# Altium PCB NIC.PCBDOC (part 2 of 2)
Units mil, origin at the board's own origin, x right, y up, seen from the top; angles counter-clockwise.
Board outline 6450 x 3500 mil, 6 copper layers (Top Layer, Internal Plane 1, MidLayer1, MidLayer2, Internal Plane 2, Bottom Layer); 176 components, 198 nets, 890 pads, 410 vias.
Unrouted connection lines stored in the file: 18.
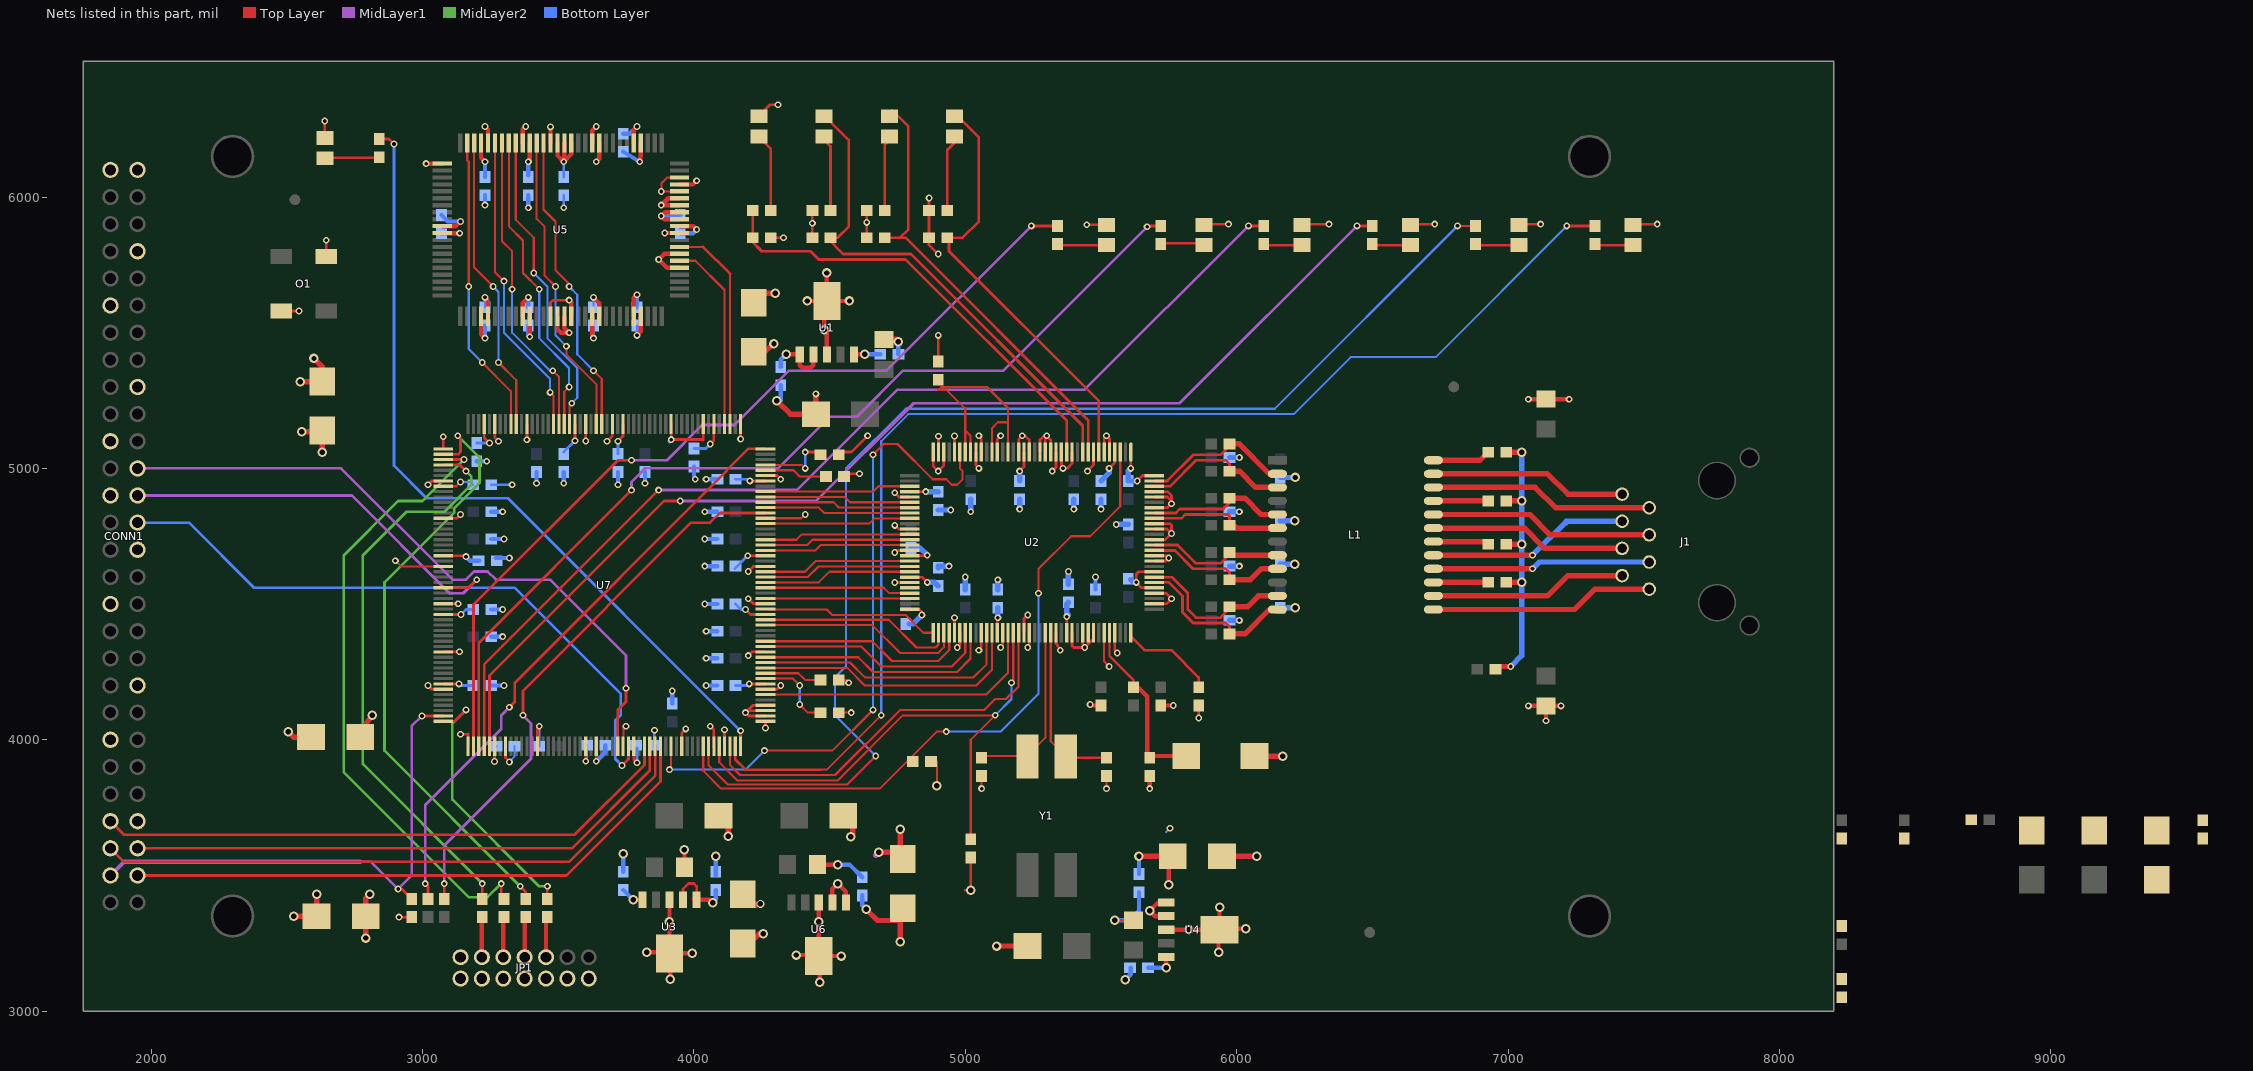
[diagram p6: the nets of this part, all layers, seen from the top]

## Via types
v1: diameter 25, hole 13.5, Top Layer to Bottom Layer, 333 vias
v2: diameter 35, hole 20, Top Layer to Bottom Layer, 76 vias
v3: diameter 30, hole 20, Top Layer to Bottom Layer, 1 vias

## Nets (pads, with @x,y where several pads share a name; then routed paths per layer and width w, separated by ;. In a path a pad name is that pad's centre, name@x,y a point inside that pad or via, vN(x,y) a via of type N, cw(c..) or ccw(c..) an arc to the next point about the centre after c; other vN are vias at no path point) (continued)
DQ24: U5.18 U7.131 | length 1124.3
  Top Layer w8: U5.18@3446.02,6199.1 3446.02,5953.98 3490,5910 3490,5730 3540,5680 v1(3540,5670) ; v1(3630,5360) 3660.16,5329.84 U7.131@3660.16,5163.5
  Bottom Layer w8: v1(3540,5670) 3570,5640 3570,5420 v1(3630,5360)
DQ25: U5.19 U7.132 | length 1126.7
  Top Layer w8: U5.19@3420.43,6199.1 3420.43,5919.57 3450,5890 3450,5710 v1(3490,5670) ; v1(3530,5450) 3530,5420 3640.47,5309.53 U7.132@3640.47,5163.5
  Bottom Layer w8: v1(3490,5670) 3490,5490 v1(3530,5450)
DQ26: U5.22 U7.137 | length 1140.9
  Top Layer w8: U5.22@3343.66,6199.1 3343.66,5916.34 3410,5850 v1(3410,5720) ; U7.137@3542.05,5163.5 3542.05,5232.05 v1(3550,5240)
  Bottom Layer w8: v1(3410,5720) 3460,5670 3460,5480 3570,5370 3570,5260 v1(3550,5240)
DQ27: U5.23 U7.138 | length 1134.8
  Top Layer w8: U5.23@3318.07,6199.1 3318.07,5891.93 3370,5840 3370,5720 v1(3430,5660) ; U7.138@3522.36,5163.5 3522.36,5282.36 v1(3540,5300)
  Bottom Layer w8: v1(3430,5660) 3430,5480 3540,5370 v1(3540,5300)
DQ28: U5.24 U7.139 | length 1128.5
  Top Layer w8: U5.24@3292.48,6199.1 3292.48,5837.52 3330,5800 v1(3330,5660) ; v1(3480,5360) 3502.68,5337.32 U7.139@3502.68,5163.5
  Bottom Layer w8: v1(3330,5660) 3330,5500 3470,5360 v1(3480,5360)
DQ29: U5.25 U7.140 | length 1125.1
  Top Layer w8: U5.25@3266.89,6199.1 3266.89,5723.11 v1(3300,5690) ; v1(3470,5280) 3482.99,5267.01 U7.140@3482.99,5163.5
  Bottom Layer w8: v1(3300,5690) 3300,5500 3470,5330 v1(3470,5280)
DQ30: U5.28 U7.147 | length 1080.8
  Top Layer w8: U5.28@3190,6180 3190,5740 v1(3260,5670) ; v1(3280,5390) 3345.2,5324.8 U7.147@3345.2,5163.5
  Bottom Layer w8: v1(3260,5670) 3280,5650 v1(3280,5390)
DQ31: U5.29 U7.148 | length 1102.3
  Top Layer w8: U5.29@3164.53,6199.1 3164.53,6135.47 3170,6130 v1(3170,5670) ; v1(3220,5390) 3325.51,5284.49 U7.148@3325.51,5163.5
  Bottom Layer w8: v1(3170,5670) 3170,5440 v1(3220,5390)
GND: C1.1 C2.1 C3.1 C4.1 C5.1 C6.1 C7.1 C8.1 C9.1 C10.1 C11.1 C12.1 C13.1 C14.1 C15.1 C16.1 C17.1 C18.1 C19.2 C20.2 C21.2 C22.2 C23.1 C24.1 C25.1 C26.1 C28.1 C29.1 C30.1 C31.2 C32.1 C33.2 C34.2 C35.2 C36.2 C37.2 C38.2 C39.2 C40.2 C41.2 C42.2 C43.2 C44.2 C45.2 C46.2 C47.2 C48.2 C49.2 C50.2 C51.1 C52.1 C53.1 C54.1 C55.1 C56.1 C57.1 C58.1 C59.1 C60.2 C61.1 C62.1 C63.1 C64.1 C65.1 C66.1 C67.1 C68.1 C69.1 C70.1 C71.1 C72.1 C73.1 C74.1 C75.2 C76.2 C77.1 C78.2 C79.2 C80.1 C81.2 C82.2 C83.2 C84.2 C85.2 C86.2 C87.2 C88.2 C89.1 C90.1 C91.1 C92.1 C93.1 C94.1 C95.1 C96.1 C97.1 C98.2 C99.1 CONN1.2 CONN1.7 CONN1.12 CONN1.17 CONN1.22 CONN1.26 CONN1.29 CONN1.34 CONN1.39 CONN1.44 CONN1.49 DS1.2 DS2.2 DS3.2 DS4.2 DS5.2 DS6.2 DS7.2 DS11.2 JP1.1 JP1.3 JP1.5 JP1.7 JP1.9 JP1.11 JP1.13 O1.2 R10.1 R18.2 R25.1 R31.1 R35.1 U1.3 U2.1 U2.5 U2.6 U2.8 U2.12 U2.14 U2.16 U2.17 U2.18 U2.20 U2.22 U2.26 U2.30 U2.36 U2.38 U2.43 U2.49 U2.54 U2.59 U2.64 U2.70 U2.74 U2.78 U2.82 U2.88 U2.91 U2.93 U2.94 U2.95 U2.97 U2.99 U2.104 U2.106 U2.107 U2.110 U2.112 U2.113 U2.116 U2.118 U2.119 U2.122 U2.124 U2.125 U2.128 U3.3 U4.3 U5.5 U5.10 U5.17 U5.21 U5.26 U5.31 U5.40 U5.55 U5.60 U5.64 U5.67 U5.71 U5.76 U5.85 U5.87 U5.90 U5.92 U5.93 U5.94 U5.95 U5.96 U5.98 U6.3 U7.1 U7.8 U7.14 U7.25 U7.30 U7.41 U7.47 U7.53 U7.59 U7.66 U7.75 U7.82 U7.91 U7.99 U7.105 U7.112 U7.118 U7.129 U7.134 U7.145 U7.151 U7.157 U7.163 U7.170 U7.179 U7.186 U7.195 U7.202 | length 15221.7
  Top Layer w8: v1(2900,4660) 2921.1,4638.9 U7.179@3076.5,4638.9 ; U7.30@3738.9,3976.5 v1@3740,4050 ; U5.96@3947.21,6020.75 3880.75,6020.75 v1(3880,6020) 3880,6050 3901.93,6071.93 U5.98@3947.21,6071.93 ; U7.91@4263.5,4816.06 4396.06,4816.06 v1(4410,4830) ; R35.1@4533.46,4220 4560,4220 v1(4570,4210) ; R18.2@4900,5415.12 v1(4900,5490) ; v1(5050,4330) 5058.82,4338.82 U2.74@5058.82,4394.65 ; v1(5060,3820) C33.2@5060,3866.54 ; U2.97@5511.57,4394.65 5511.57,4288.43 v1(5530,4270) ; v1(5520,3820) C34.2@5520,3866.54 ; U2.99@5550.94,4394.65 5550.94,4329.06 v1(5560,4320) ; v2(5551.12,3335.12) C89.1@5620,3335.12
  Top Layer w10: O1.2@2480,5580 v1(2545,5580) ; DS7.2@2640,6217.4 v1(2640,6280) ; v1(3020,4200) 3033.86,4186.14 U7.202@3076.5,4186.14 ; v1(3020,4940) 3033.86,4953.86 U7.163@3076.5,4953.86 ; U7.195@3076.5,4323.94 v1(3136.06,4323.94) ; U7.186@3076.5,4501.1 v1(3131.1,4501.1) ; U7.170@3076.5,4816.06 3126.06,4816.06 v1(3140,4830) ; U7.157@3076.5,5071.97 v1(3076.5,5116.5) ; v1(3140,4020) 3166.06,4020 3168.03,4021.97 U7.1@3168.03,3976.5 ; U7.151@3266.46,5163.5 3266.46,5113.54 v1(3280,5100) ; U7.8@3305.83,3976.5 3305.83,3934.17 v1@3320,3920 ; v1(3384.57,5105.43) U7.145@3384.57,5163.5 ; U7.14@3423.94,3976.5 3423.94,4043.94 v1(3430,4050) ; U5.64@3471.61,5560.9 3471.61,5611.61 3480,5620 v1(3540,5620) ; v1(3601.1,5101.1) U7.134@3601.1,5163.5 ; v1(3640.47,3920.47) U7.25@3640.47,3976.5 ; v1(3680,5100) 3699.53,5119.53 U7.129@3699.53,5163.5 ; U7.118@3916.06,5163.5 v1(3916.06,5106.06) 4032.28,5106.06 4034.17,5104.17 U7.112@4034.17,5163.5 ; U7.41@3955.43,3976.5 3955.43,4025.43 v1(3970,4040) ; v1(4060,4050) 4073.54,4036.46 4073.54,3973.54 U7.47@4071.76,3971.76 ; v1(4171.97,5108.03) U7.105@4171.97,5163.5 ; v1(4200,4310) 4213.94,4323.94 U7.66@4263.5,4323.94 ; v1(4200,4520) 4218.9,4501.1 U7.75@4263.5,4501.1 ; v1(4200,4620) 4218.9,4638.9 U7.82@4263.5,4638.9 ; DS11.2@4240,6300 4280,6340 v1(4310,6340) ; v1(4263.5,4043.5) U7.53@4263.5,4068.03 ; U7.59@4263.5,4186.14 4306.14,4186.14 v1(4320,4200) ; U7.99@4263.5,4973.54 4306.46,4973.54 v1(4320,4960) ; R31.1@4283.46,5850 v1(4330,5850) ; R25.1@4533.46,5060 4580,5060 v1(4640,5120) ; v1(4740,4790) 4753.46,4776.54 U2.49@4795.04,4776.54 ; v1(4740,4910) 4755.35,4894.65 U2.43@4795.04,4894.65 ; v1(4740.31,4579.69) U2.59@4795.04,4579.69 ; U2.64@4795.04,4481.26 4828.74,4481.26 4840,4470 v1(4840,4460) ; U2.54@4795.04,4678.11 4858.11,4678.11 v1(4860,4680) ; U2.38@4881.65,5060 4881.65,5008.35 v1(4900,4990) 4921.02,5011.02 U2.36@4921.02,5060 ; v1(4970,4340) 4980.08,4350.08 U2.70@4980.08,4394.65 ; U2.30@5039.14,5060 5039.14,5010.86 v1(5050,5000) ; U2.26@5117.88,5060 5117.88,5107.88 v1(5130,5120) ; v1(5130,4340) 5137.56,4347.56 U2.78@5137.56,4394.65 ; U2.22@5196.61,5060 5196.61,5106.61 v1(5210,5120) 5220,5120 5235.98,5104.02 U2.20@5235.98,5060 ; U2.82@5216.3,4394.65 5216.3,4446.3 v1(5230,4460) ; U2.18@5275.35,5060 5275.35,5105.35 5290,5120 v1(5300,5120) ; U2.17@5295.04,5060 5295.04,5115.04 v1(5300,5120) ; U2.16@5314.73,5060 5314.73,5105.27 v1(5300,5120) ; U2.88@5334.41,4394.65 5334.41,4355.59 v1(5350,4330) ; U2.14@5354.1,5060 5354.1,5005.9 v1(5360,5000) 5375.73,5000 5393.47,5017.74 U2.12@5393.47,5060 ; U2.91@5393.47,4394.65 5393.47,4346.53 5400,4340 v1(5440,4340) ; U2.93@5432.84,4394.65 5432.84,4347.16 v1(5440,4340) ; v1(5447.4,5897.4) DS1.2@5520,5897.4 ; v1(5450,4990) 5472.2,5012.2 U2.8@5472.2,5060 ; 5452.52,4352.52 U2.94@5452.52,4394.65 ; U2.95@5472.2,4394.65 5472.2,4372.2 v1(5440,4340) ; U2.6@5511.57,5060 5511.57,5111.57 v1(5520,5120) 5531.26,5108.74 U2.5@5531.26,5060 ; v1@5550,4800 v1(5556.54,4793.46) ; v1(5610,5000) U2.1@5610,5060 ; v1(5633.46,4953.46) 5653.39,4973.39 U2.128@5696.61,4973.39 ; U2.104@5696.61,4500.95 5740.95,4500.95 v1(5760,4520) 5739.68,4540.32 U2.106@5696.61,4540.32 ; U2.107@5696.61,4560 5650,4560 v1(5630,4580) 5630,4610 5639.06,4619.06 U2.110@5696.61,4619.06 ; U2.112@5696.61,4658.43 5738.43,4658.43 v1(5750,4670) 5741.89,4678.11 U2.113@5696.61,4678.11 ; U2.116@5696.61,4737.17 5737.17,4737.17 v1(5760,4760) ; U2.118@5696.61,4776.54 5743.46,4776.54 v1(5760,4760) ; U2.119@5696.61,4796.22 5753.78,4796.22 5760,4790 v1(5760,4760) ; U2.122@5696.61,4855.28 5745.28,4855.28 v1(5760,4870) 5760,4900 5745.67,4914.33 U2.125@5696.61,4914.33 ; U2.124@5696.61,4894.65 5745.35,4894.65 v1@5760,4880 ; v1(5860,4080) R10.1@5860,4126.54 ; DS2.2@5900,5900 v1(5970,5900) ; DS3.2@6260,5900 v1(6340,5900) ; DS4.2@6660,5900 v1(6730,5900) ; DS5.2@7060,5900 v1(7120,5900) ; DS6.2@7490,5900 v1(7550,5900)
  Top Layer w16: v1(3013.11,6123.11) U5.31@3072.79,6123.11 ; U5.40@3072.79,5892.8 3122.8,5892.8 v1(3140,5910) ; v1(3230,5630) 3241.3,5618.7 U5.55@3241.3,5560.9 ; v1(3230,6260) 3241.3,6248.7 U5.26@3241.3,6199.1 ; U5.60@3369.25,5560.9 3369.25,5609.25 v1(3390,5630) ; U5.21@3369.25,6199.1 3369.25,6249.25 v1(3380,6260) ; U5.17@3471.61,6199.1 v1(3471.61,6258.39) ; v1(3540,5620) 3548.39,5611.61 U5.67@3548.39,5560.9 ; v1(3630,5630) 3650.75,5609.25 U5.71@3650.75,5560.9 ; v1(3640,6130) 3650.75,6140.75 U5.10@3650.75,6199.1 ; U5.76@3778.7,5560.9 3778.7,5628.7 v1(3790,5640) ; U5.5@3778.7,6199.1 3778.7,6248.7 v1(3790,6260) ; v2(3826.85,3216.85) U3.3@3910,3216.85 ; v1(3892.8,5867.2) U5.90@3947.21,5867.2 ; U3.3@3910,3213.15 v2(3993.15,3213.15) ; U3.3@3910,3410 3910,3210 U3.3@3920,3200 ; v2(3913.15,3116.85) U3.3@3913.15,3200 ; U5.85@3947.21,5739.25 3900.75,5739.25 v1(3870,5770) 3890.43,5790.43 U5.87@3947.21,5790.43 ; U5.92@3947.21,5918.39 3891.61,5918.39 v1(3880,5930) 3893.98,5943.98 U5.93@3947.21,5943.98 ; U5.94@3947.21,5969.57 3880.43,5969.57 v1(3880,5970) 3905.16,5995.16 U5.95@3947.21,5995.16 ; C77.1@3965.12,3530 v2(3965.12,3595.12) ; v2(4376.85,3206.85) U6.3@4460,3206.85 ; v2(4416.85,5616.85) v2(4573.15,5616.85) ; C99.1@4455.12,3540 v2(4530,3540) ; U6.3@4460,3200 U6.3@4470,3190 ; U6.3@4460,3203.15 v2(4543.15,3203.15) ; U6.3@4460,3230 U6.3@4460,3400 ; v2(4463.15,3106.85) U6.3@4463.15,3190 ; v2(4480,5510) U1.3@4480,5590 ; U1.3@4490,5430 v2@4490,5510 ; U1.3@4490,5610 v2(4490,5720) ; v1@5463.46,4126.54 C15.1@5500,4126.54 ; v1(5680,3820) C17.1@5680,3866.54 ; C16.1@5720,4126.54 v1(5766.54,4126.54) ; U4.3@5740,3300 v2(5824,3300) ; v2@5830,3300 U4.3@5936.85,3300 v2(5936.85,3383.15) ; v2(5933.15,3216.85) U4.3@5933.15,3300 ; U4.3@5940,3300 U4.3@5950,3310 ; U4.3@5950,3303.15 v2(6033.15,3303.15) ; v1(7074.88,4124.88) v1(7194.88,4124.88) ; v1(7074.88,5255.12) v1(7224.88,5255.12) ; v1(7140,4070) C29.1@7140,4124.88
  Top Layer w20: v2(2550,5320) C81.2@2630,5320 ; v2(2600,5405) 2630,5375 C81.2@2630,5320.55 ; C82.2@2770.55,4010 2770.55,4030.55 v2(2815,4090) ; v2(2790.55,3269.45) 2790.55,3415.55 v2(2805,3430) ; v2(4125.98,3644.02) C75.2@4125.98,3720 ; C78.2@4190,3215 4190,3235 v2@4240,3285 ; C76.2@4220,5645.98 4299.02,5645.98 v2(4300,5645) ; v2(4305,5250) 4355,5200 C31.2@4449.45,5200 v1(4449.45,5274.45) ; v2(4577.34,3642.34) 4585.98,3650.98 C98.2@4585.98,3720 ; v2(4680.98,3585.98) 4760,3585.98 v2(4760,3670) ; C71.1@4700,5475.12 4744.88,5475.12 v2(4753.46,5466.54) ; v2(5115,3240) C87.2@5194.02,3240 ; C86.2@5981.1,3570.88 v2(6074.12,3570.88) ; C18.1@6065.98,3940 v2(6170,3940)
  MidLayer1 w20: v2@4670,3575 v2(4680.98,3585.98)
  Bottom Layer w8: C57.1@3230,5593.46 v1(3230,5630) ; C8.1@3253.46,4940 v1(3330,4940) ; v1@3320,3920 3339.29,3939.29 C91.1@3339.29,3976.5 ; C59.1@3630,5593.46 v1(3630,5630) ; v1@5040,4330 v1(5050,4330) ; 5740,3660 v1(5754.02,3674.02) ; v1@7070,4120 v1(7074.88,4124.88) ; v1(7194.88,4124.88) v1@7200,4130
  Bottom Layer w10: C94.1@3429.84,3976.5 3429.84,4049.84 v1(3430,4050) ; v1(3520,5960) C53.1@3520,6006.54 ; C13.1@3853.46,3980 3853.46,4033.46 v1(3855,4035)
  Bottom Layer w16: C55.1@3070,5933.46 3093.46,5910 v1(3140,5910) ; C90.1@3200,5026.54 v1(3236.54,5026.54) ; v1(3230,5970) C51.1@3230,6006.54 ; C11.1@3253.46,4200 v1@3290,4200 ; C65.1@3253.46,4380 v1@3290,4380 ; C10.1@3253.46,4480 v1@3290,4480 ; C64.1@3253.46,4740 v1@3290,4740 ; C1.1@3253.46,4840 v1@3290,4840 ; C9.1@3270,4670 3306.54,4670 ; C58.1@3390,5593.46 v1(3390,5630) ; v1(3390,5960) C52.1@3390,6006.54 ; v1@3420,4950 C3.1@3420,4986.54 ; v1@3520,4950 C68.1@3520,4986.54 ; v1(3640.47,3920.47) 3673.46,3953.46 C12.1@3673.46,3980 ; v1@3720,4950 C69.1@3720,4986.54 ; C80.1@3740,3513.46 v2(3740,3580) ; C54.1@3740,6233.46 3763.46,6233.46 v1(3790,6260) ; C60.2@3790,5593.46 v1(3790,5640) ; v1@3820,4950 C4.1@3820,4986.54 ; v1(3880,5930) 3946.54,5930 C56.1@3950,5933.46 ; v1@3910,5100 v1(3916.06,5106.06) ; C63.1@3920,4133.46 v1@3920,4170 ; v1@4000,4970 C93.1@4000,5006.54 ; v1@4050,4200 C14.1@4086.54,4200 ; v1@4050,4300 C62.1@4086.54,4300 ; v1@4050,4400 C6.1@4086.54,4400 ; v1@4050,4500 C66.1@4086.54,4500 ; v1@4050,4640 C92.1@4086.54,4640 ; v1@4050,4740 C7.1@4086.54,4740 ; v1@4050,4840 C5.1@4086.54,4840 ; v1@4050,4960 C67.1@4086.54,4960 ; C32.1@4080,3500 v2(4080,3570) ; v2@4320,5250 C30.1@4320,5306.54 ; v2(4530,3540) 4573.46,3540 C74.1@4620,3493.46 ; C73.1@4753.46,5420 v2(4753.46,5466.54) ; C46.2@5480,4553.46 v1(5480,4600) ; v2(5551.12,3335.12) 5605.12,3335.12 5640,3370 C72.1@5640,3438.28 ; v2(5590,3116) 5610,3136 C97.1@5610,3160
  Bottom Layer w20: v1@4740,4580 v1(4740.31,4579.69) ; C43.2@4793.46,4426.54 4806.54,4426.54 v1(4840,4460) ; C42.2@4800,4706.54 4833.46,4706.54 v1(4860,4680) ; C39.2@4900,4633.46 4900,4640 v1(4940,4640) ; C35.2@4900,4846.54 v1(4946.54,4846.54) ; C44.2@5000,4553.46 v1(5000,4600) ; v1(5020,4840) C41.2@5020,4886.54 ; C36.2@5120,4553.46 v1(5120,4590) ; v1(5200,4850) C45.2@5200,4886.54 ; C37.2@5380,4573.46 v1(5380,4620) ; v1(5400,4850) C40.2@5400,4886.54 ; v1(5500,4850) C38.2@5500,4886.54 ; v1(5556.54,4793.46) C48.2@5600,4793.46 ; C47.2@5610,4590 5620,4580 v1(5630,4580) ; v1(5610,5000) 5600,4990 C49.2@5600,4953.46 v1(5633.46,4953.46) ; C20.2@5973.46,4440 v1(6010,4440) ; C21.2@5973.46,4640 v1(6010,4640) ; C22.2@5973.46,4840 v1(6010,4840) ; C19.2@5973.46,5040 v1(6010,5040) ; C26.1@6160,4486.54 v2(6216.54,4486.54) ; C25.1@6160,4646.54 v2(6213.46,4646.54) ; C24.1@6160,4806.54 v2(6213.46,4806.54) ; C23.1@6160,4966.54 v2(6216.54,4966.54)
  other v1: 3320,3918 3750,4050 5460,4130 3920,4180 3300,4200 4045,4200 4045,4300 3295,4380 4045,4400 3295,4480 4040,4500 4040,4640 3320,4670 3300,4740 4040,4740 3295,4840 4040,4840 3720,4940 3420,4945 3520,4945 3820,4945 4005,4960 4045,4960
  other v2: 4255,3285 3910,3330 4460,3330
GTX_CLK: U2.79 U7.58 | length 1074.6
  Top Layer w8: U7.58@4263.5,4166.46 5076.46,4166.46 5157.24,4247.24 U2.79@5157.24,4394.65
IOCLK: CONN1.25 U7.183 | length 1555.7
  Top Layer w10: U7.183@3076.5,4560.16 3170.16,4560.16 v1(3200,4590)
  MidLayer1 w10: CONN1.25@1950,4900 2740,4900 3100,4540 3150,4540 v1(3200,4590)
LED0: R2.2 U7.2 | length 3251.6
  Top Layer w10: U7.2@3187.72,3976.5 3187.72,4497.72 3720,5030 v1(3770,5030) ; v1(5243.46,5893.46) R2.2@5340,5893.46
  MidLayer1 w10: v1(3770,5030) 3900,5030 4030,5160 4150,5160 4350,5360 4710,5360 v1(5243.46,5893.46)
LED1: R3.2 U7.3 | length 3542.4
  Top Layer w10: U7.3@3207.4,3976.5 3207.4,4357.4 v1(3770,4920) ; v1@5673.46,5893.46 R3.2@5720,5893.46
  MidLayer1 w10: v1(3770,4920) 3770,4950 3820,5000 4310,5000 4500,5190 4600,5190 4770,5360 5140,5360 v1(5670,5890)
LED2: R4.2 U7.4 | length 3843
  Top Layer w10: U7.4@3227.09,3976.5 3227.09,4277.09 v1(3870,4920) ; v1(6043.46,5893.46) R4.2@6100,5893.46
  MidLayer1 w10: v1(3870,4920) 4380,4920 4750,5290 5440,5290 v1(6043.46,5893.46)
LED3: R5.2 U7.5 | length 4199.7
  Top Layer w10: U7.5@3246.77,3976.5 3246.77,4236.77 3890,4880 v1(3950,4880) ; v1(6443.46,5893.46) R5.2@6500,5893.46
  MidLayer1 w10: v1(3950,4880) 4450,4880 4810,5240 5790,5240 v1(6443.46,5893.46)
LED4: R6.2 U7.46 | length 4588.2
  Top Layer w8: U7.46@4053.86,3976.5 4053.86,3906.14 4125,3835 4565,3835 v1(4670,3940) ; v1(6813.46,5893.46) R6.2@6880,5893.46
  Bottom Layer w8: v1(4670,3940) 4520,4090 4520,4230 4560,4270 4560,5000 4780,5220 6140,5220 v1(6813.46,5893.46)
LED5: R7.2 U7.51 | length 4663.6
  Top Layer w8: 4467.37,3890 4490,3890 v1(4690,4090)
  Top Layer w10: U7.51@4152.28,3976.5 4152.28,3927.72 4190,3890 4467.37,3890 ; v1(7216.54,5893.46) R7.2@7320,5893.46
  Bottom Layer w8: v1@4690,4080 4690,5100 4790,5200 6210,5200 6420,5410 6733.07,5410 v1(7216.54,5893.46)
LED6: R1.2 U7.52 | length 2985.8
  Top Layer w10: R1.2@2840,6213.46 2876.54,6213.46 v1(2895,6195) ; U7.52@4171.97,3976.5 v1(4171.97,4033.03)
  Bottom Layer w10: v1(2895,6195) 2895,5010 3015,4890 3315,4890 v1(4171.97,4033.03)
NetC17_2: C17.2 C18.2 R8.1 U2.98 | length 676.1
  Top Layer w8: U2.98@5531.26,4394.65 5531.26,4308.74 5620,4220 R8.1@5620,4193.46
  Top Layer w16: R8.1@5620,4193.46 5636.54,4193.46 5670,4160 5670,3956.54 5686.54,3940 C18.2@5834.02,3940
NetC27_2: C27.2 R19.1 R20.1 R21.1 R22.1 | length 1093.4
  Top Layer w20: C27.2@6953.46,4260 6963.46,4270 v1(7010,4270) ; R19.1@6993.46,4580 v2(7050,4580) ; R20.1@6993.46,4720 v2(7050,4720) ; R21.1@6993.46,4880 v2(7050,4880) ; R22.1@6993.46,5060 v2(7050,5060)
  Bottom Layer w20: v1(7010,4270) 7050,4310 v2(7050,5060)
NetC33_1: C33.1 U2.86 Y1.1 | length 650.2
  Top Layer w8: C33.1@5060,3940 5227.64,3940 5295.04,4007.4 U2.86@5295.04,4394.65
NetC34_1: C34.1 U2.87 Y1.2 | length 630.6
  Top Layer w8: U2.87@5314.73,4394.65 5314.73,3994.64 5375.91,3933.46 C34.1@5520,3933.46
NetC73_2: C73.2 U1.5 | length 96.5
  Top Layer w16: U1.5@4590,5420 v2(4630,5420)
  Bottom Layer w16: v2(4630,5420) C73.2@4686.54,5420
NetC80_2: C80.2 U3.5 | length 85.1
  Top Layer w16: v2(3776.54,3410) U3.5@3810,3410
  Bottom Layer w16: C80.2@3740,3446.54 v2(3776.54,3410)
NetC97_2: C97.2 U4.5 | length 106.5
  Top Layer w16: v2(5740,3160) U4.5@5740,3200
  Bottom Layer w16: C97.2@5673.46,3160 v2(5740,3160)
NetDS1_1: DS1.1 R2.1 | length 176.1
  Top Layer w10: R2.1@5343.94,5822.6 DS1.1@5520,5822.6
NetDS2_1: DS2.1 R3.1 | length 151.5
  Top Layer w10: R3.1@5723.46,5830 DS2.1@5875,5830
NetDS3_1: DS3.1 R4.1 | length 136.1
  Top Layer w10: R4.1@6103.94,5822.6 DS3.1@6240,5822.6
NetDS4_1: DS4.1 R5.1 | length 141.6
  Top Layer w10: R5.1@6500,5826.54 6503.94,5822.6 DS4.1@6640,5822.6
NetDS5_1: DS5.1 R6.1 | length 156.1
  Top Layer w10: R6.1@6883.94,5822.6 DS5.1@7040,5822.6
NetDS6_1: DS6.1 R7.1 | length 136.1
  Top Layer w10: R7.1@7323.94,5822.6 DS6.1@7460,5822.6
NetDS7_1: DS7.1 R1.1 | length 195
  Top Layer w10: DS7.1@2650,6145 R1.1@2845,6145
NetDS8_1: DS8.1 R32.1 | length 261
  Top Layer w10: R32.1@4933.46,5950 4933.46,6173.46 DS8.1@4960,6200
NetDS8_2: DS8.2 R28.1 U2.7 | length 1593.1
  Top Layer w10: R28.1@4933.46,5850 4990,5850 5050,5910 5050,6220 DS8.2@4970,6300 ; R28.1@4940,5860 4940,5800 5491.89,5248.11 U2.7@5491.89,5060
NetDS9_1: DS9.1 R33.1 | length 281
  Top Layer w10: R33.1@4703.46,5950 4703.46,6193.46 DS9.1@4730,6220
NetDS9_2: DS9.2 R29.1 U2.9 | length 1645.8
  Top Layer w10: R29.1@4710,5850 4780,5850 5452.52,5177.48 U2.9@5452.52,5060 ; DS9.2@4730,6320 4790,6260 4790,5880 4760,5850
NetDS10_1: DS10.1 R34.1 | length 269.7
  Top Layer w10: DS10.1@4480,6210 4503.46,6186.54 R34.1@4503.46,5950
NetDS10_2: DS10.2 R30.1 U2.10 | length 1841.4
  Top Layer w10: R30.1@4490,5850 4550,5790 4800,5790 5432.84,5157.16 U2.10@5432.84,5060 ; DS10.2@4498.37,6291.63 4498.37,6281.63 4570,6210 4570,5890 4530,5850 R30.1@4503.46,5850
NetDS11_1: DS11.1 R27.1 | length 288
  Top Layer w10: DS11.1@4240,6220 4283.46,6176.54 R27.1@4283.46,5950
NetJ1_1: J1.1 L1.13 | length 831.1
  Top Layer w20: L1.13@6725,4480 7245,4480 7320,4555 ; 7325,4555 J1.1@7530,4555
NetJ1_2: J1.2 L1.14 | length 736.1
  Top Layer w20: L1.14@6725,4530 7145,4530 7220,4605 J1.2@7430,4605
NetJ1_3: J1.3 L1.16 | length 805.4
  Top Layer w20: L1.16@6725,4630 v1(7090,4630)
  Bottom Layer w20: v1(7090,4630) 7115,4655 J1.3@7520,4655
NetJ1_4: J1.4 L1.19 | length 736.1
  Top Layer w20: L1.19@6725,4780 7060,4780 7135,4705 J1.4@7430,4705
NetJ1_5: J1.5 L1.20 | length 826.1
  Top Layer w20: L1.20@6725,4830 7080,4830 7155,4755 J1.5@7520,4755
NetJ1_6: J1.6 L1.17 | length 751.8
  Top Layer w20: L1.17@6725,4680 v1(7090,4680)
  Bottom Layer w20: v1(7090,4680) 7215,4805 J1.6@7420,4805 ; 7210,4800 7215,4800
NetJ1_7: J1.7 L1.22 | length 841.1
  Top Layer w20: L1.22@6710,4930 7100,4930 7175,4855 J1.7@7520,4855
NetJ1_8: J1.8 L1.23 | length 726.1
  Top Layer w20: L1.23@6725,4980 7145,4980 7220,4905 J1.8@7420,4905
NetL1_2: L1.2 R17.1 U2.127 | length 552.7
  Top Layer w10: U2.127@5696.61,4953.7 5743.7,4953.7 5840,5050 5940,5050 5973.46,5083.46 R17.1@5973.46,5090
  Top Layer w20: R17.1@5980,5090 6010,5090 6120,4980 L1.2@6150,4980
NetL1_3: L1.3 R16.1 U2.126 | length 550.1
  Top Layer w10: U2.126@5696.61,4934.02 5754.02,4934.02 5850,5030 5960,5030 5973.46,5016.54 R16.1@5973.46,4990
  Top Layer w20: R16.1@5973.46,4990 6010,4990 6070,4930 L1.3@6150,4930
NetL1_5: L1.5 R15.1 U2.121 | length 510.5
  Top Layer w10: U2.121@5696.61,4835.59 5775.59,4835.59 5790,4850 5950,4850 5973.46,4873.46 R15.1@5973.46,4890
  Top Layer w20: R15.1@5973.46,4890 6030,4890 6090,4830 L1.5@6150,4830
NetL1_6: L1.6 R14.1 U2.120 | length 494.8
  Top Layer w10: U2.120@5696.61,4815.91 5795.91,4815.91 5810,4830 5970,4830 5973.46,4826.54 R14.1@5973.46,4790
  Top Layer w20: R14.1@5980,4790 5990,4790 6000,4780 L1.6@6150,4780
NetL1_8: L1.8 R13.1 U2.115 | length 494.4
  Top Layer w10: U2.115@5696.61,4717.48 5782.52,4717.48 5850,4650 5940,4650 R13.1@5970,4680
  Top Layer w20: R13.1@5973.46,4690 5983.46,4680 L1.8@6150,4680
NetL1_9: L1.9 R12.1 U2.114 | length 530.1
  Top Layer w10: U2.114@5696.61,4697.8 5772.2,4697.8 5840,4630 5960,4630 5973.46,4616.54 R12.1@5973.46,4590
  Top Layer w20: R12.1@5973.46,4590 6050,4590 6090,4630 L1.9@6150,4630
NetL1_11: L1.11 R9.1 U2.109 | length 575.9
  Top Layer w10: U2.109@5696.61,4599.37 5760.63,4599.37 5820,4540 5820,4480 5850,4450 5940,4450 R9.1@5970,4480
  Top Layer w20: R9.1@5973.46,4490 6040,4490 6080,4530 L1.11@6150,4530
NetL1_12: L1.12 R11.1 U2.108 | length 626.7
  Top Layer w10: U2.108@5690,4580 5750,4580 5800,4530 5800,4470 5840,4430 5960,4430 5973.46,4416.54 R11.1@5973.46,4390
  Top Layer w20: R11.1@5973.46,4390 6030,4390 6120,4480 L1.12@6150,4480
NetL1_15: L1.15 R19.2 | length 201.5
  Top Layer w20: L1.15@6725,4580 R19.2@6926.54,4580
NetL1_18: L1.18 R20.2 | length 199.1
  Top Layer w20: L1.18@6725,4730 6910,4730 R20.2@6920,4720
NetL1_21: L1.21 R21.2 | length 201.5
  Top Layer w20: L1.21@6725,4880 R21.2@6926.54,4880
NetL1_24: L1.24 R22.2 | length 214
  Top Layer w20: L1.24@6725,5030 6896.54,5030 R22.2@6926.54,5060
NetR10_2: R10.2 U2.102 | length 348.7
  Top Layer w10: U2.102@5610,4380 5660,4330 5760,4330 5860,4230 R10.2@5860,4193.46
NetR18_1: R18.1 U2.24 U2.27 U2.31 U2.32 | length 975.3
  Top Layer w8: 4900,5290 4930,5290 4999.77,5220.23 U2.32@4999.77,5060 ; 4910,5300 5080,5300 5157.24,5222.76 U2.24@5157.24,5060 ; 4999.77,5140 5019.45,5120.31 U2.31@5019.45,5060 ; U2.27@5098.19,5060 5098.19,5148.19 5120,5170 5157.24,5170
NetR25_2: R25.2 U7.101 | length 271.8
  Top Layer w8: U7.101@4263.5,5012.91 4397.09,5012.91 v1(4410,5000)
  Top Layer w10: v1(4410,5060) R25.2@4470,5060
  Bottom Layer w8: v1(4410,5000) v1(4410,5060)
NetR26_1: R26.1 U7.100 | length 236.1
  Top Layer w8: U7.100@4263.5,4993.23 4366.77,4993.23 4390,4970 R26.1@4490,4970
NetR27_2: R27.2 R31.2 U2.13 | length 1654.9
  Top Layer w10: R31.2@4210,5840 4250,5800 4430,5800 4460,5770 4780,5770 5373.78,5176.22 U2.13@5373.78,5060 ; R31.2@4216.54,5850 R27.2@4216.54,5950
NetR35_2: R35.2 U7.62 | length 213.5
  Top Layer w8: U7.62@4263.5,4245.2 4384.8,4245.2 4410,4220 R35.2@4466.54,4220
NetR36_1: R36.1 U7.61 | length 296
  Top Layer w8: U7.61@4263.5,4225.51 4364.49,4225.51 v1(4390,4200) ; v1(4390,4130) 4420,4100 R36.1@4466.54,4100
  Bottom Layer w8: v1(4390,4130) v1(4390,4200)
NetR37_1: R37.1 U7.104 | length 2219.1
  Top Layer w10: v1(3010,3470) 3020,3460 R37.1@3020,3413.46 ; v1(3320,4120) 3340,4140 3340,4210 4120,4990 4120,4991.97 4200,5071.97 U7.104@4263.5,5071.97
  MidLayer1 w10: v1(3010,3470) 3010,3760 3290,4040 3290,4090 v1(3320,4120)
NetR40_1: R40.1 U7.92 | length 2076.6
  Top Layer w10: R40.1@3080,3413.46 v1(3080,3470) ; v1(3370,4090) 3370,4180 3990,4800 4060,4800 4095.75,4835.75 U7.92@4263.5,4835.75
  MidLayer1 w10: v1(3080,3470) 3080,3610 3400,3930 3400,4060 v1(3370,4090)
NetR41_1: R41.1 U7.159 | length 2316.7
  Top Layer w10: U7.159@3076.5,5032.6 v1(3152.6,5032.6) ; v1(3290,3470) 3290,3423.46 R41.1@3300,3413.46
  MidLayer2 w10: v1(3152.6,5032.6) 3000,4880 2910,4880 2710,4680 2710,3880 3170,3420 3240,3420 v1(3290,3470)
NetR42_1: R42.1 U7.208 | length 980.7
  Top Layer w10: U7.208@3076.5,4068.03 3118.03,4068.03 v1(3160,4110) ; R42.1@3460,3413.46 v1(3460,3460)
  MidLayer2 w10: v1(3160,4110) 3110,4060 3110,3780 3430,3460 v1(3460,3460)
NetR43_1: R43.1 U7.158 | length 2230.9
  Top Layer w10: U7.158@3076.5,5052.28 3132.28,5052.28 3140,5060 3140,5110 v1(3130,5120) ; v1(3360,3460) 3380,3440 R43.1@3380,3413.46
  MidLayer2 w10: v1(3130,5120) 3210,5040 3210,4945.96 3116.33,4852.29 3116.33,4836.33 2860,4580 2860,3960 v1(3360,3460)
NetR44_1: R44.1 U7.160 | length 2101.2
  Top Layer w10: U7.160@3076.5,5012.91 3137.09,5012.91 v1(3160,4990) ; R44.1@3220,3420 v1(3220,3470)
  MidLayer2 w10: v1(3160,4990) 3180,4970 3180,4940 3080,4840 2940,4840 2780,4680 2780,3910 v1(3220,3470)
NEWFRAME: CONN1.23 U7.29 | length 2456.9
  Top Layer w10: U7.29@3719.21,3976.5 3719.21,4109.21 3750,4140 v1(3750,4190)
  MidLayer1 w10: CONN1.23@1950,5000 2700,5000 3110,4590 3160,4590 3190,4620 3240,4620 3270,4590 3470,4590 3750,4310 v1(3750,4190)
NEXTFRAME: CONN1.27 U7.31 | length 2405.9
  Top Layer w10: v1(3735,3905) 3758.58,3928.58 U7.31@3758.58,3976.5
  Bottom Layer w8: CONN1.27@1950,4800 CONN1.27@1960,4800
  Bottom Layer w10: CONN1.27@1960,4800 2140,4800 2380,4560 3340,4560 3730,4170 3730,4090 3710,4070 3710,3930 v1(3735,3905)
O\E\: U5.86 U7.108 | length 703.9
  Top Layer w8: U5.86@3947.21,5764.84 4005.16,5764.84 4112.91,5657.09 U7.108@4112.91,5163.5
P\R\O\G\R\A\M\: CONN1.54 R39.1 U7.207 | length 1940.1
  Top Layer w10: v1(2910,3450) 2923.46,3450 R39.1@2960,3413.46 ; v1(2997.72,4087.72) U7.207@3076.5,4087.72
  MidLayer1 w10: 2770,3550 2810,3550 v1(2910,3450) 2960,3500 2960,4050 v1(2997.72,4087.72)
  MidLayer1 w16: CONN1.54@1850,3500 1900,3550 2770,3550
PHYINT: R23.2 U2.3 U7.45 | length 2554.3
  Top Layer w8: U7.45@4034.17,3976.5 4034.17,3885.83 4100,3820 4684.88,3820 4894.88,4030 v1(4930,4030) ; v1(5270,4540) 5270,4630 5390,4750 5460,4750 5570.63,4860.63 U2.3@5570.63,5060
  Bottom Layer w8: v1(4930,4030) 5130,4030 5270,4170 v1(5270,4540)
PHYMDC: U2.81 U7.50 | length 1481.9
  Top Layer w8: U7.50@4132.6,3976.5 4132.6,3907.4 4170,3870 4520,3870 4760,4110 5070,4110 5110,4150 5150,4150 5196.61,4196.61 U2.81@5196.61,4394.65
PHYMDIO: R24.2 U2.80 U7.48 | length 2008.1
  Top Layer w8: U7.48@4093.23,3976.5 4093.23,3916.77 4160,3850 4530,3850 4770,4090 v1(5110,4090) 5020,4000 R24.2@5020,3655.12 ; v1(5170,4210) 5176.93,4216.93 U2.80@5176.93,4394.65
  Bottom Layer w8: v1(5110,4090) 5170,4150 v1(5170,4210)
PHYRESET: U2.33 U7.39 | length 2391.2
  Top Layer w8: v1(3910,3890) 3916.06,3896.06 U7.39@3916.06,3976.5 ; v1(4260,3960) 4510,3960 v1(4660,4110) ; v1(4660,5050) 4700,5090 4750,5090 4880,4960 4930,4960 4950,4940 4970,4940 4990,4960 4990,4990 4980.08,4999.92 U2.33@4980.08,5060
  Bottom Layer w8: v1(3910,3890) 4190,3890 v1(4260,3960) ; v1(4660,4110) v1(4660,5050)
RX_CLK: U2.57 U7.79 | length 547.8
  Top Layer w8: U7.79@4263.5,4579.84 4459.84,4579.84 4499.06,4619.06 U2.57@4795.04,4619.06
RX_DV: U2.44 U7.95 | length 539.8
  Top Layer w8: U7.95@4263.5,4894.8 4555.2,4894.8 4575.04,4874.96 U2.44@4795.04,4874.96
RX_ER: U2.41 U7.96 | length 539.6
  Top Layer w8: U7.96@4263.5,4914.49 4660.47,4914.49 4680,4934.02 U2.41@4795.04,4934.02
RXD0: U2.56 U7.80 | length 547.8
  Top Layer w8: U7.80@4263.5,4599.53 4419.53,4599.53 4458.74,4638.74 U2.56@4795.04,4638.74
RXD1: U2.55 U7.81 | length 547.8
  Top Layer w8: U7.81@4263.5,4619.21 4409.21,4619.21 4448.43,4658.43 U2.55@4795.04,4658.43
RXD2: U2.52 U7.85 | length 539.6
  Top Layer w8: U7.85@4263.5,4697.95 4447.95,4697.95 4467.48,4717.48 U2.52@4795.04,4717.48
RXD3: U2.51 U7.86 | length 539.6
  Top Layer w8: U7.86@4263.5,4717.64 4417.64,4717.64 4437.17,4737.17 U2.51@4795.04,4737.17
RXD4: U2.50 U7.87 | length 539.6
  Top Layer w8: U7.87@4263.5,4737.32 4377.32,4737.32 4396.85,4756.85 U2.50@4795.04,4756.85
RXD5: U2.47 U7.90 | length 539.6
  Top Layer w8: U7.90@4263.5,4796.38 4646.38,4796.38 4665.91,4815.91 U2.47@4795.04,4815.91
RXD6: U2.46 U7.93 | length 539.8
  Top Layer w8: U7.93@4263.5,4855.43 4460.16,4855.43 4480,4835.59 U2.46@4795.04,4835.59
RXD7: U2.45 U7.94 | length 539.8
  Top Layer w8: U7.94@4263.5,4875.12 4514.88,4875.12 4534.72,4855.28 U2.45@4795.04,4855.28
SCS: CONN1.53 U7.37 | length 2200.1
  Top Layer w10: CONN1.53@1950,3500 3530,3500 3876.69,3846.69 U7.37@3876.69,3976.5
SERCLK: CONN1.50 U7.34 | length 2163.9
  Top Layer w10: CONN1.50@1850,3700 1900,3650 3560,3650 3817.64,3907.64 U7.34@3817.64,3976.5
SI: CONN1.52 U7.36 | length 2268.5
  Top Layer w10: CONN1.52@1850,3600 1900,3550 3540,3550 3857.01,3867.01 U7.36@3857.01,3976.5
SO: CONN1.51 U7.35 | length 2095.5
  Top Layer w10: CONN1.51@1950,3600 3550,3600 3837.32,3887.32 U7.35@3837.32,3976.5
TCK: JP1.6 R41.2 | length 145.3
  Top Layer w16: JP1.6@3297.48,3198.74 R41.2@3297.48,3344.02
TDI: JP1.10 R42.2 | length 142.8
  Top Layer w16: JP1.10@3454.96,3198.74 R42.2@3454.96,3341.5
TDO: JP1.8 R43.2 | length 144
  Top Layer w16: JP1.8@3376.22,3198.74 R43.2@3376.22,3342.76
TMS: JP1.4 R44.2 | length 142.5
  Top Layer w16: JP1.4@3218.74,3198.74 R44.2@3218.74,3341.26
TX_CLK: U2.60
TX_EN: U2.62 U7.76 | length 531.6
  Top Layer w8: U7.76@4263.5,4520.79 4263.66,4520.63 U2.62@4795.04,4520.63
TX_ER: U2.61 U7.78 | length 539.8
  Top Layer w8: U7.78@4263.5,4560.16 4699.84,4560.16 4719.68,4540.32 U2.61@4795.04,4540.32
TXD0: U2.76 U7.63 | length 1022.1
  Top Layer w8: U7.63@4263.5,4264.88 4565.12,4264.88 4630,4200 5040,4200 5098.19,4258.19 U2.76@5098.19,4394.65
TXD1: U2.75 U7.64 | length 973.8
  Top Layer w8: U7.64@4263.5,4284.57 4575.43,4284.57 4630,4230 5030,4230 5078.51,4278.51 U2.75@5078.51,4394.65
TXD2: U2.72 U7.65 | length 894.1
  Top Layer w8: U7.65@4263.5,4304.25 4605.75,4304.25 4660,4250 4970,4250 5019.45,4299.45 U2.72@5019.45,4394.65
TXD3: U2.71 U7.67 | length 862.3
  Top Layer w8: U7.67@4263.5,4343.62 4616.38,4343.62 4690,4270 4950,4270 4999.77,4319.77 U2.71@4999.77,4394.65
TXD4: U2.68 U7.68 | length 788.4
  Top Layer w8: U7.68@4263.5,4363.31 4656.69,4363.31 4730,4290 4900,4290 4940.71,4330.71 U2.68@4940.71,4394.65
TXD5: U2.67 U7.71 | length 762.3
  Top Layer w8: U7.71@4263.5,4422.36 4657.64,4422.36 4760,4320 4900,4320 4921.02,4341.02 U2.67@4921.02,4394.65
TXD6: U2.66 U7.72 | length 728.1
  Top Layer w8: U7.72@4263.5,4442.05 4717.95,4442.05 4820,4340 4890,4340 4901.34,4351.34 U2.66@4901.34,4394.65
TXD7: U2.65 U7.74 | length 647
  Top Layer w8: U7.74@4270,4480 4490,4480 4510,4460 4780,4460 4845.35,4394.65 U2.65@4881.65,4394.65
VCC: C8.2 C9.2 C10.2 C11.2 C12.2 C13.2 C14.2 C28.2 C30.2 C32.2 C35.1 C36.1 C37.1 C38.1 C39.1 C45.1 C51.2 C52.2 C53.2 C54.2 C55.2 C56.2 C57.2 C58.2 C59.2 C60.1 C61.2 C66.2 C67.2 C68.2 C69.2 C72.2 C74.2 C76.1 C78.1 C79.1 C81.1 C82.1 C83.1 C86.1 C88.1 C90.2 C91.2 C92.2 C93.2 CONN1.1 JP1.2 O1.4 R23.1 R24.1 R26.2 R28.2 R29.2 R30.2 R32.2 R33.2 R34.2 R36.2 R39.2 U1.1 U1.2 U2.4 U2.15 U2.21 U2.29 U2.34 U2.37 U2.42 U2.53 U2.58 U2.69 U2.77 U2.83 U2.90 U3.1 U3.2 U4.1 U4.2 U5.4 U5.11 U5.14 U5.15 U5.16 U5.20 U5.27 U5.41 U5.54 U5.61 U5.65 U5.66 U5.70 U5.77 U5.91 U5.97 U6.1 U6.2 U7.6 U7.23 U7.32 U7.49 U7.54 U7.55 U7.56 U7.60 U7.73 U7.84 U7.98 U7.110 U7.127 U7.136 U7.153 U7.164 U7.177 U7.188 U7.201 | length 7711.6
  Top Layer w8: U7.164@3076.5,4934.17 3124.17,4934.17 v1(3140,4950) ; R36.2@4533.46,4100 v1(4580,4100) ; R26.2@4553.46,4980 v1(4610,4980) ; v2(4895.12,3829.88) 4895.12,3920 ; v2(5020,3445) 5020,3544.88
  Top Layer w10: O1.4@2645.35,5780 v1(2645.35,5840.35) ; v1(2913.46,3346.54) R39.2@2960,3346.54 ; U7.201@3076.5,4205.83 v1(3134.17,4205.83) ; U7.188@3076.5,4461.73 v1(3141.73,4461.73) ; U7.177@3076.5,4678.27 3158.27,4678.27 v1@3160,4680 ; U7.153@3227.09,5163.5 3227.09,5112.91 v1(3246.54,5093.46) ; v1(3265,3920) U7.6@3266.46,3976.5 ; v1(3561.73,5101.73) U7.136@3561.73,5163.5 ; v1(3601.1,3921.1) U7.23@3601.1,3976.5 ; v1(3720,5100) 3738.9,5118.9 U7.127@3738.9,5163.5 ; U7.32@3778.27,3976.5 3778.27,3926.73 v1(3790,3915) ; U3.2@3960,3415 3960,3450 3980,3470 4000,3470 4010,3460 U3.1@4010,3410 ; v1(4060,5090) 4073.54,5103.54 U7.110@4073.54,5163.5 ; U7.49@4112.91,3976.5 v1(4112.91,4037.09) ; v1(4190,4480) 4208.27,4461.73 U7.73@4263.5,4461.73 ; v1@4197.4,4107.4 U7.55@4263.5,4107.4 ; v1(4198.27,4678.27) U7.84@4263.5,4678.27 ; v1(4204.17,4205.83) U7.60@4263.5,4205.83 ; v1(4206.14,4953.86) U7.98@4263.5,4953.86 ; U7.54@4263.5,4087.72 4202.28,4087.72 v1(4190,4100) 4217.09,4127.09 U7.56@4263.5,4127.09 ; R30.2@4436.54,5850 R34.2@4436.54,5950 ; R29.2@4636.54,5850 R33.2@4636.54,5950 ; v1(4740,4690) 4747.8,4697.8 U2.53@4795.04,4697.8 ; U2.58@4795.04,4599.37 4840.63,4599.37 v1(4860,4580) ; U2.42@4795.04,4914.33 v1(4854.33,4914.33) ; v1(4866.54,5996.54) 4866.54,5823.46 v1(4900,5790) ; U2.37@4901.34,5060 v1(4901.34,5118.66) ; U2.69@4960.4,4394.65 v1(4960.4,4449.6) ; U2.34@4960.4,5060 v1(4960.4,5119.6) ; 5000,3445 v2(5020,3445) ; v1(5050,5120) 5058.82,5111.18 U2.29@5058.82,5060 ; U2.77@5117.88,4394.65 5117.88,4447.88 v1(5120,4450) ; v1(5200,4990) 5216.3,5006.3 U2.21@5216.3,5060 ; v1(5230,4340) 5235.98,4345.98 U2.83@5235.98,4394.65 ; v1(5320,4990) 5334.41,5004.41 U2.15@5334.41,5060 ; U2.90@5373.78,4394.65 v1(5373.78,4453.78) ; v1(5530,5000) 5550.94,5020.94 U2.4@5550.94,5060
  Top Layer w16: U5.41@3072.79,5867.2 3135.87,5867.2 v1(3136.54,5866.54) ; U5.54@3215.71,5560.9 3215.71,5494.29 v1(3230,5480) ; U5.27@3215.71,6199.1 3215.71,6144.29 v1(3230,6130) ; v1(3390,6130) 3394.84,6134.84 U5.20@3394.84,6199.1 ; v1(3394.84,5484.84) U5.61@3394.84,5560.9 ; U5.65@3497.2,5560.9 3497.2,5512.8 3510,5500 v1@3530,5500 ; U5.16@3497.2,6199.1 3497.2,6152.8 v1(3520,6130) 3548.39,6158.39 U5.14@3548.39,6199.1 ; U5.66@3522.8,5560.9 3522.8,5517.2 v1(3540,5500) ; v1@3522.8,6132.8 U5.15@3522.8,6199.1 ; U5.70@3625.16,5560.9 3625.16,5484.84 v1(3630,5480) ; U5.11@3625.16,6199.1 3625.16,6245.16 v1(3640,6260) ; v1(3790,5490) 3804.29,5504.29 U5.77@3804.29,5560.9 ; v1(3800,6130) 3804.29,6154.29 U5.4@3804.29,6199.1 ; U5.91@3947.21,5892.8 3997.2,5892.8 v1(4010,5880) ; U5.97@3947.21,6046.34 3996.34,6046.34 v1(4010,6060) ; U3.1@4000,3410 4060,3410 v2(4070,3400) ; v2(4340,5420) U1.1@4390,5420 ; U1.1@4390,5410 4390,5380 4399.57,5370.43 4430.43,5370.43 4440,5380 U1.2@4440,5420 ; U6.2@4510,3400 4510,3450 v2(4530,3470) 4560,3440 U6.1@4560,3400 ; U4.2@5740,3350 5700,3350 v2(5680,3370) 5710,3400 U4.1@5740,3400 ; v2(5750,3466) 5750,3520
  Top Layer w20: v2(2505,4030) 2525,4010 C82.1@2589.45,4010 ; v2(2525,3350) C83.1@2610,3350 ; v2(2555,5135) 2630,5135 v2(2630,5060) ; C83.1@2609.45,3350 v2(2609.45,3430.55) ; C78.1@4180,3465.98 4180,3440 4230,3390 ; C76.1@4220,5394.02 v2(4295,5460) ; v2(4635,3375) 4675.98,3334.02 4760,3334.02 v2(4760,3255) ; v2@5635.88,3570.88 C86.1@5729.13,3570.88
  Bottom Layer w8: v1(3140,4950) 3176.54,4950 C8.2@3186.54,4940 ; v1(3265,3920) 3266.46,3970.59 C91.2@3272.36,3976.5 ; v1(3601.1,3921.1) 3606.54,3926.54 C12.2@3606.54,3980 ; v1(3630,5480) C59.2@3630,5526.54 ; v1(3790,5490) C60.1@3790,5526.54 ; v1(4866.54,5996.54) v1@4870,6000
  Bottom Layer w10: v1(3134.17,4205.83) 3140,4200 C11.2@3186.54,4200 ; v1(3141.73,4461.73) 3160,4480 C10.2@3186.54,4480 ; C90.2@3200,5093.46 v1(3246.54,5093.46) ; C68.2@3520,5060 v1(3561.73,5101.73) ; C53.2@3520,6073.46 v1(3520,6130) ; C69.2@3720,5053.46 v1(3720,5100) ; v1(3790,3915) C13.2@3790,3970 ; C93.2@4000,5073.46 4043.46,5073.46 v1(4060,5090) ; C92.2@4150,4630 v1(4198.27,4678.27) ; C14.2@4153.46,4200 4198.35,4200 v1(4204.17,4205.83) ; C66.2@4153.46,4500 4173.46,4480 v1(4190,4480) ; C67.2@4153.46,4960 4200,4960 v1(4206.14,4953.86)
  Bottom Layer w16: C55.2@3070,5866.54 v1(3136.54,5866.54) ; v1(3160,4675) 3175,4660 C9.2@3210,4660 ; v1(3230,5480) C57.2@3230,5526.54 ; C51.2@3230,6073.46 v1(3230,6130) ; C58.2@3390,5526.54 3390,5489.68 v1(3394.84,5484.84) ; C52.2@3390,6080 v1(3390,6130) ; C54.2@3740,6166.54 v1(3800,6130) ; C56.2@3950,5866.54 3996.54,5866.54 v1(4010,5880) ; v2(4070,3400) 4080,3410 C32.2@4080,3446.54 ; C30.2@4320,5373.46 4320,5400 v2(4340,5420) ; C74.2@4620,3426.54 4620,3390.24 v2@4635.12,3375.12 ; C72.2@5640,3505.21 v2(5640,3570)
  Bottom Layer w20: v1(4854.33,4914.33) 4855.2,4913.46 C35.1@4900,4913.46 ; v1(4860,4580) 4886.54,4580 C39.1@4900,4566.54 ; v1@4900,5120 v1(4901.34,5118.66) ; v1@4960,4450 v1(4960.4,4449.6) ; v1(5120,4450) C36.1@5120,4486.54 ; C45.1@5200,4953.46 v1(5200,4990) ; v1@5380,4460 v1(5373.78,4453.78) 5373.78,4500.32 C37.1@5380,4506.54 ; C38.1@5500,4953.46 5530,4983.46 v1(5530,5000)
  other v1: 4436.54,5903.46 4636.54,5906.54
  other v3: 4245,3395
W\E\: U5.88 U7.107 | length 780.1
  Top Layer w8: U5.88@3947.21,5816.02 4033.98,5816.02 ; U7.107@4132.6,5163.5 4132.6,5717.4
  Top Layer w10: 4033.98,5816.02 4132.6,5717.4
pads on no net: FID1.0 FID2.0 FID3.0 FID4.0 FID5.0 FID6.0 J1.0 JP1.12 JP1.14 O1.1 S1.0 S2.0 S3.0 S4.0 U2.2 U2.23 U2.28 U2.84 U2.85 U2.89 U5.1 U5.30 U5.38 U5.39 U5.42 U5.43 U5.51 U5.80 U5.83 U5.84 U7.40 U7.42 U7.43 U7.44 U7.57 U7.77 U7.83 U7.103 U7.206 Y1.0
copper on no net:
  other v1: 4340,4660

## Polygon pours and split planes (outlines as drawn)
+2.5VPHY on MidLayer1 (solid): 5500,5200 5500,3100 7960,3100 7960,5200
+1.2VCC on MidLayer1 (solid): 2800,5500 2800,3200 4800,3200 4800,5500
+2.5VCC on MidLayer2 (solid): 4590,5190 4590,3100 2500,3100 2500,5190
+1.8VCC on MidLayer2 (solid): 5800,4300 5800,6200 4000,6200 4000,5200 4600,5200 4600,3760 5800,3760
+1.8VCC on Bottom Layer (hatched 90Degree grid 8 track 8): 4760,5170 4760,3080 5910,3080 5910,5170
GND on Internal Plane 1 (split plane): 1770.02,3020.01 1770.02,6479.98 8179.98,6479.98 8179.98,5225.02 6420,5225.02 ccw(c6420,5210) 6409.37,5220.6 6409.38,5220.62 6359.38,5170.62 6359.4,5170.63 ccw(c6370,5160) 6354.98,5160 6354.98,4230 ccw(c6370,4230) 6359.4,4219.37 6359.38,4219.38 6409.38,4169.38 6409.37,4169.4 ccw(c6420,4180) 6420,4164.98 8179.98,4164.98 8179.98,3020.01
CGND on Internal Plane 1 (split plane): 6385.02,4236.22 6426.22,4195.02 8179.98,4195.02 8179.98,5194.98 6426.22,5194.98 6385.02,5153.78
VCC on Internal Plane 2 (split plane): 1770.02,3020.01 1770.02,6479.98 8179.98,6479.98 8179.98,3020.01

## Keep-outs
Keep-Out Layer:
  lines w10: 1800,3050 1800,6450 8150,6450 8150,3050 1800,3050

## Other copper
Top Layer:
  text "LAYER 1" at 8255,3920 h60
MidLayer1:
  text "LAYER 3" at 8255,3704 h60
MidLayer2:
  text "LAYER 4" at 8255,3596 h60
Bottom Layer:
  text "LAYER 6" at 8255,3380 h60
Internal Plane 1 (plane layer: these items are gaps in the copper):
  lines w30: 8200,4180 6420,4180 6370,4230 6370,4700 6370,5160 6420,5210 8200,5210
  text "LAYER 2" at 8255,3812 h60
Internal Plane 2 (plane layer: these items are gaps in the copper):
  lines w8: 6350,3050 7950,3050 ; 7910,3600 7950,3640
  lines w10: 6350,3600 6385,3600
  text "LAYER 5" at 8255,3488 h60

## Silkscreen, mask and mechanical layers (free items; w line width, h text height)
Top Overlay:
  rectangle: 7060,6115 7080,6185
  rectangle: 7030,6195 7050,6215
  rectangle: 7030,6115 7050,6185
  rectangle: 7060,6195 7110,6215
  rectangle: 7000,6115 7020,6215
  rectangle: 6970,6165 6990,6215
  rectangle: 6940,6115 6960,6215
  lines w8: 4100,6380 4720,6380 5100,6380 5100,6100 4090,6100 4090,6380 5040,6380
  lines w10: 5130,5550 7680,5550 7680,6440 5130,6440 5130,5550
  text "POWER" at 2870,6310 h70
  text "Soma Gigabit Ethernet" at 5220,6250 h95
  text "2006" at 6720,6155 h50
  text "Copyright Eric Jonas" at 5210,6150 h45
  text "DPX" at 4190,6120 h30
  text "1000" at 4420,6120 h30
  text "100" at 4680,6120 h30
  text "ACT" at 4920,6120 h30
  text "soma.mit.edu" at 6580,6115 h30
  text "Version 1.2" at 5210,6090 h30
  text "PHY Status" at 4100,6010 h60
  text "LINK" at 5380,5630 h70
  text "TX" at 5840,5630 h70
  text "RX" at 6220,5630 h70
  text "100" at 6580,5630 h70
  text "1000" at 6940,5630 h70
  text "DPX" at 7380,5630 h70
Mechanical 5:
  the board outline again, w1
Drill Drawing:
  text ".LEGEND" at 8200,3200 h60
  text "Drill Drawing." at 8200,3100 h60

## Dimensions
1800,3050 to 1800,6450 on Mechanical 1
1800,3050 to 8150,3050 on Mechanical 1